# Altium PCB MCU_Transceiver_Board.PcbDoc
Units mil, origin at the board's own origin, x right, y up, seen from the top; angles counter-clockwise.
Board outline 2855 x 2555 mil, 2 copper layers (Top Layer, Bottom Layer); 78 components, 60 nets, 301 pads, 143 vias.
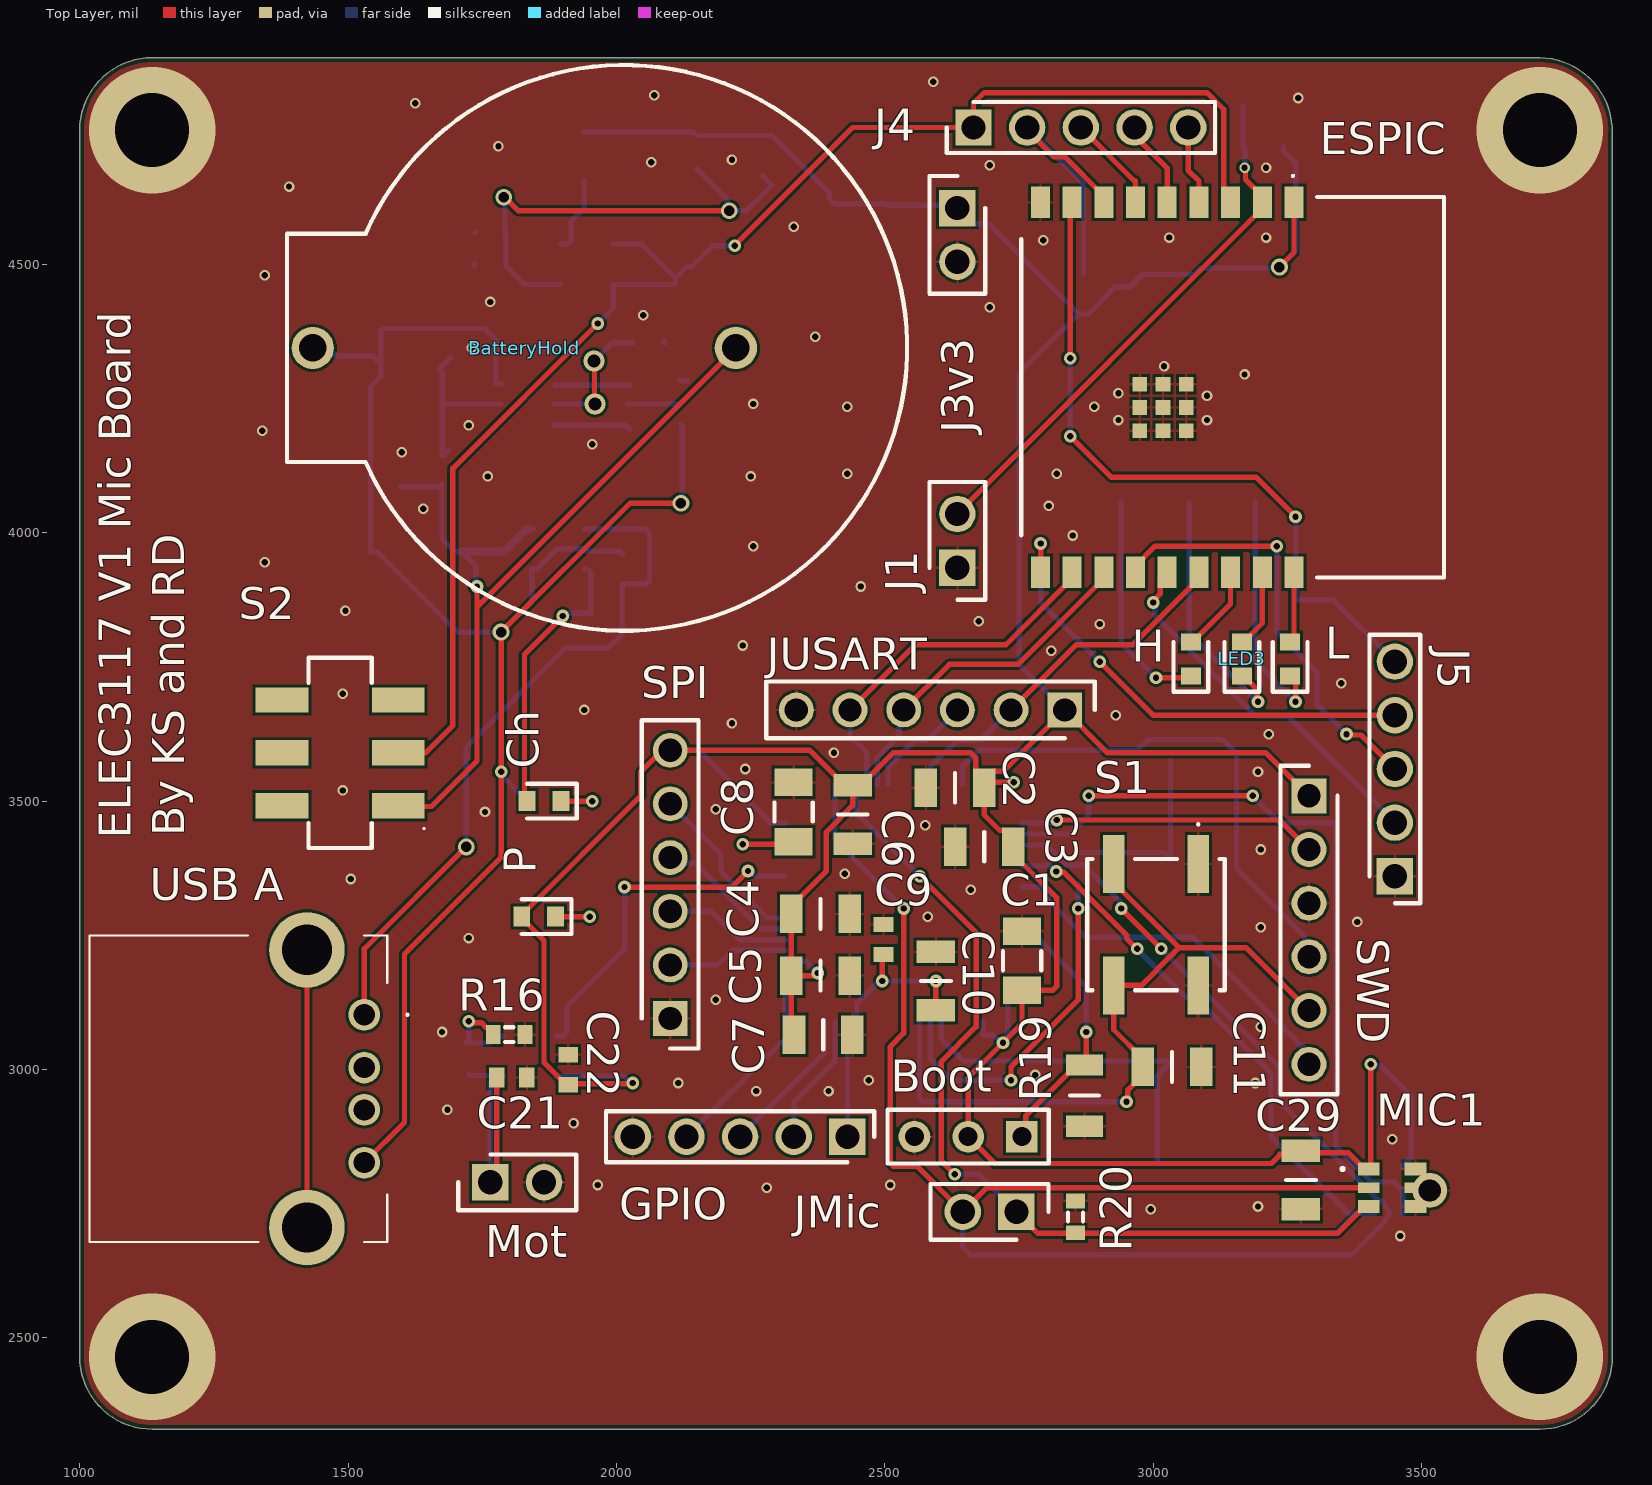
[diagram p0: Top Layer view]
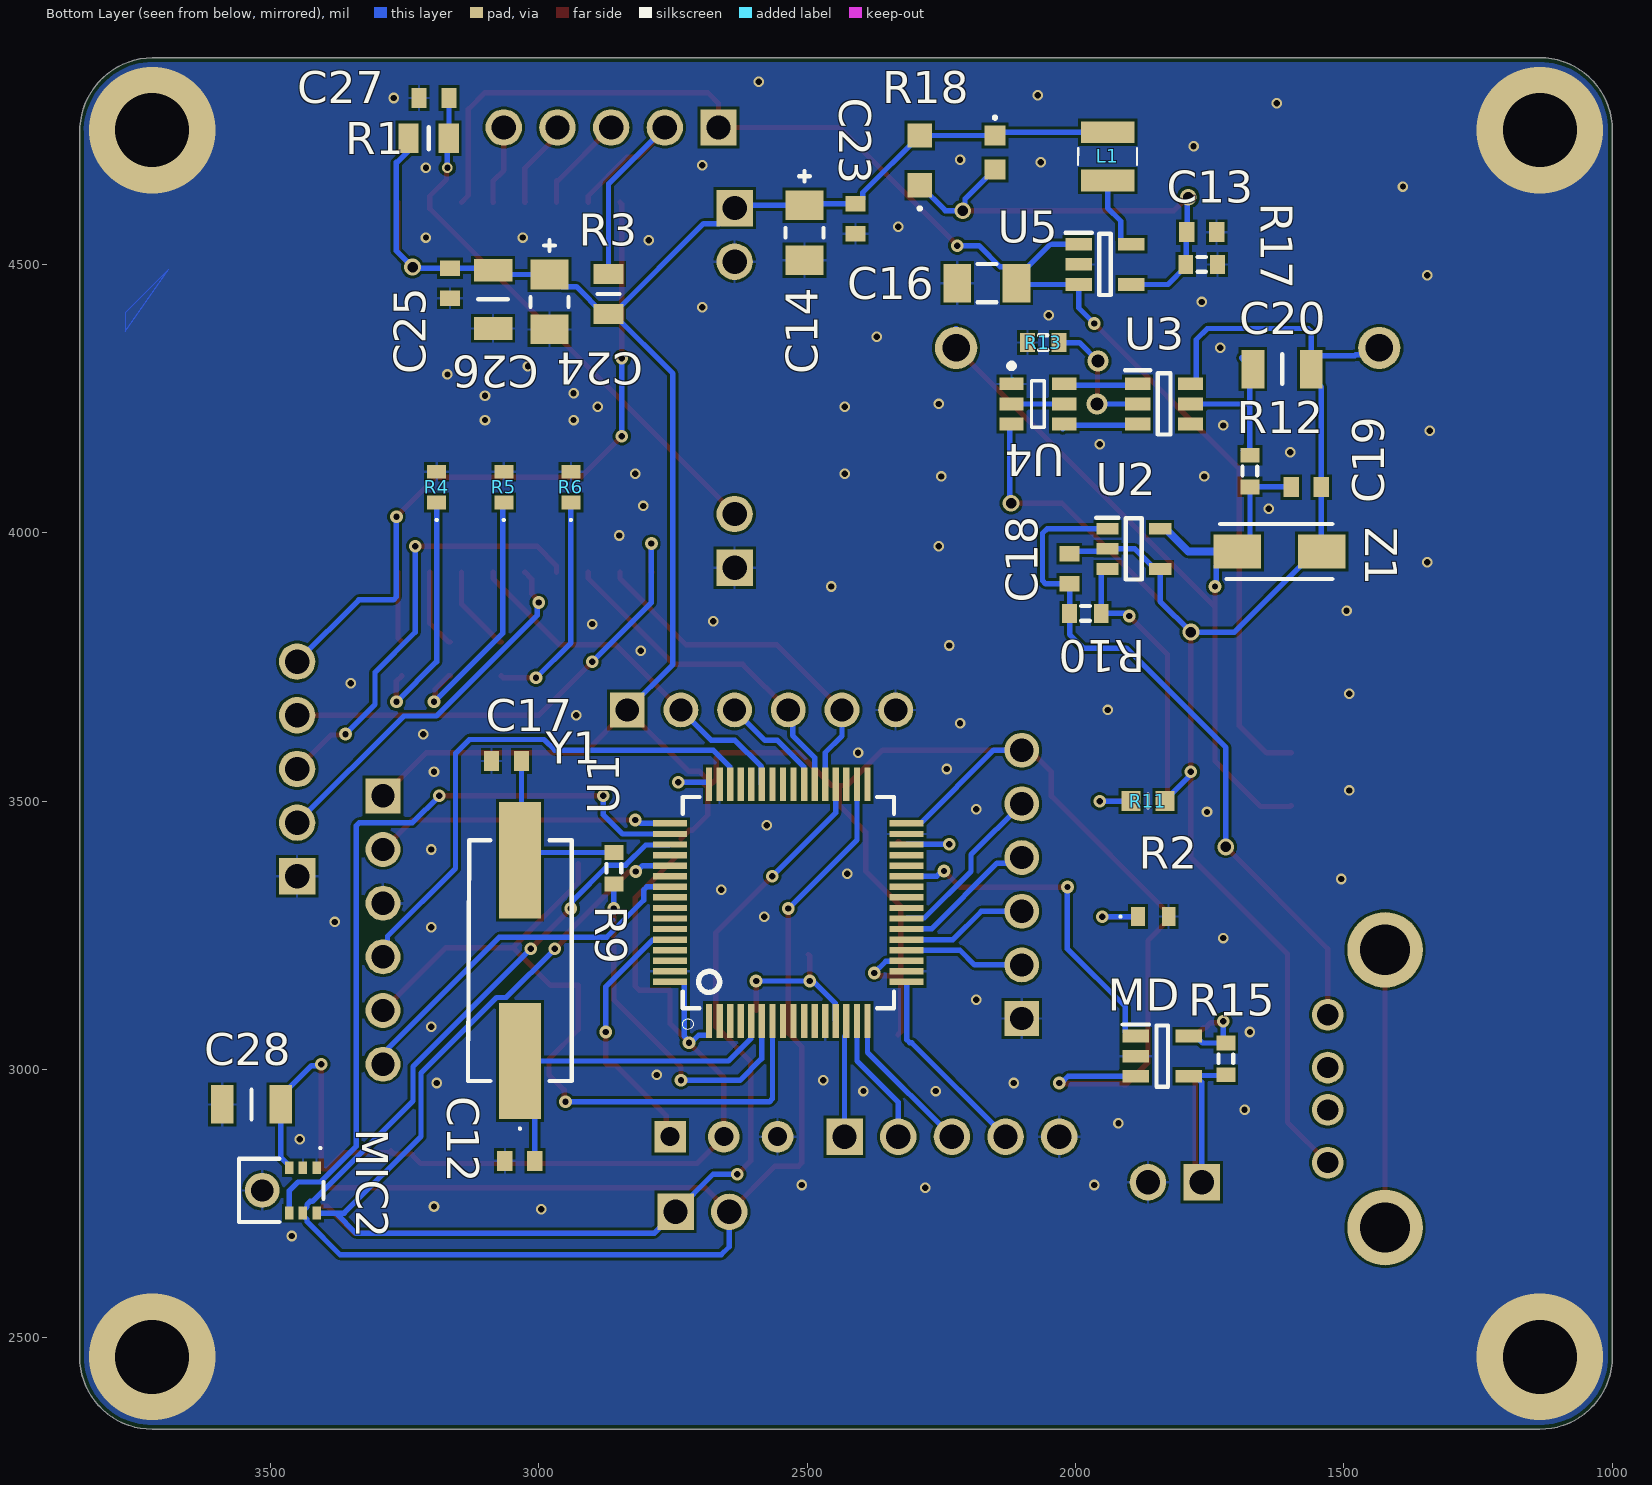
[diagram p1: Bottom Layer view, seen from below]
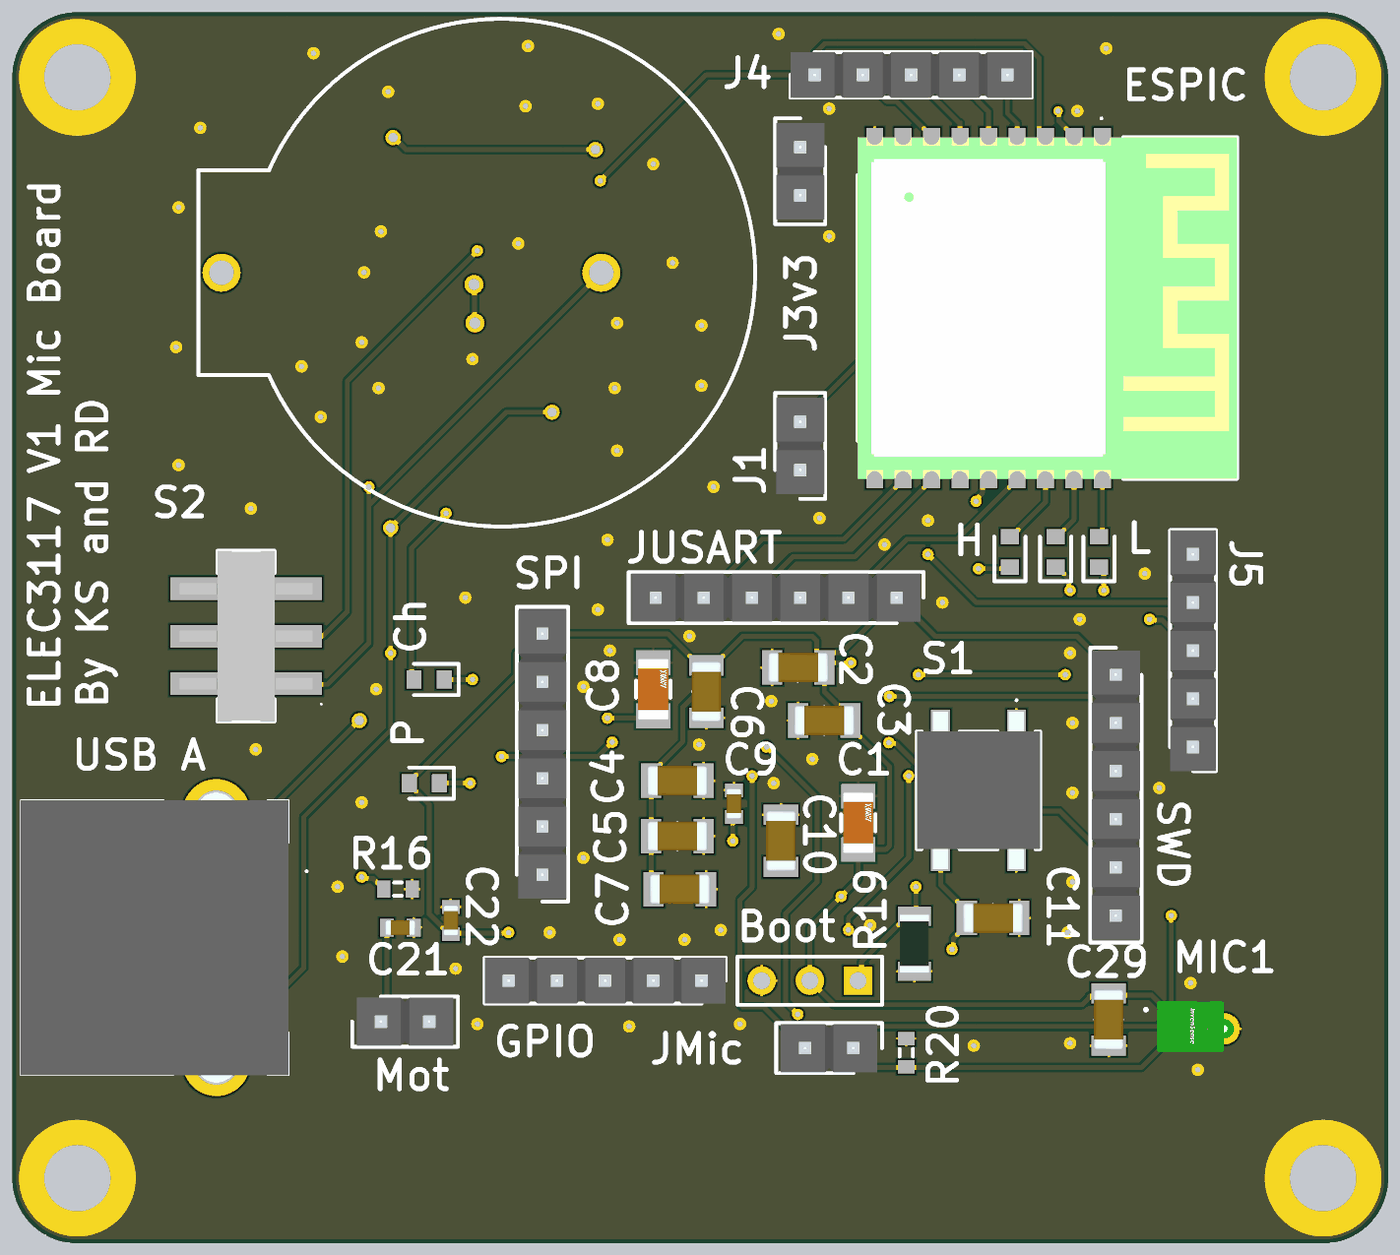
[diagram p2: 3D render of the assembled board from above, using the file's embedded part models]
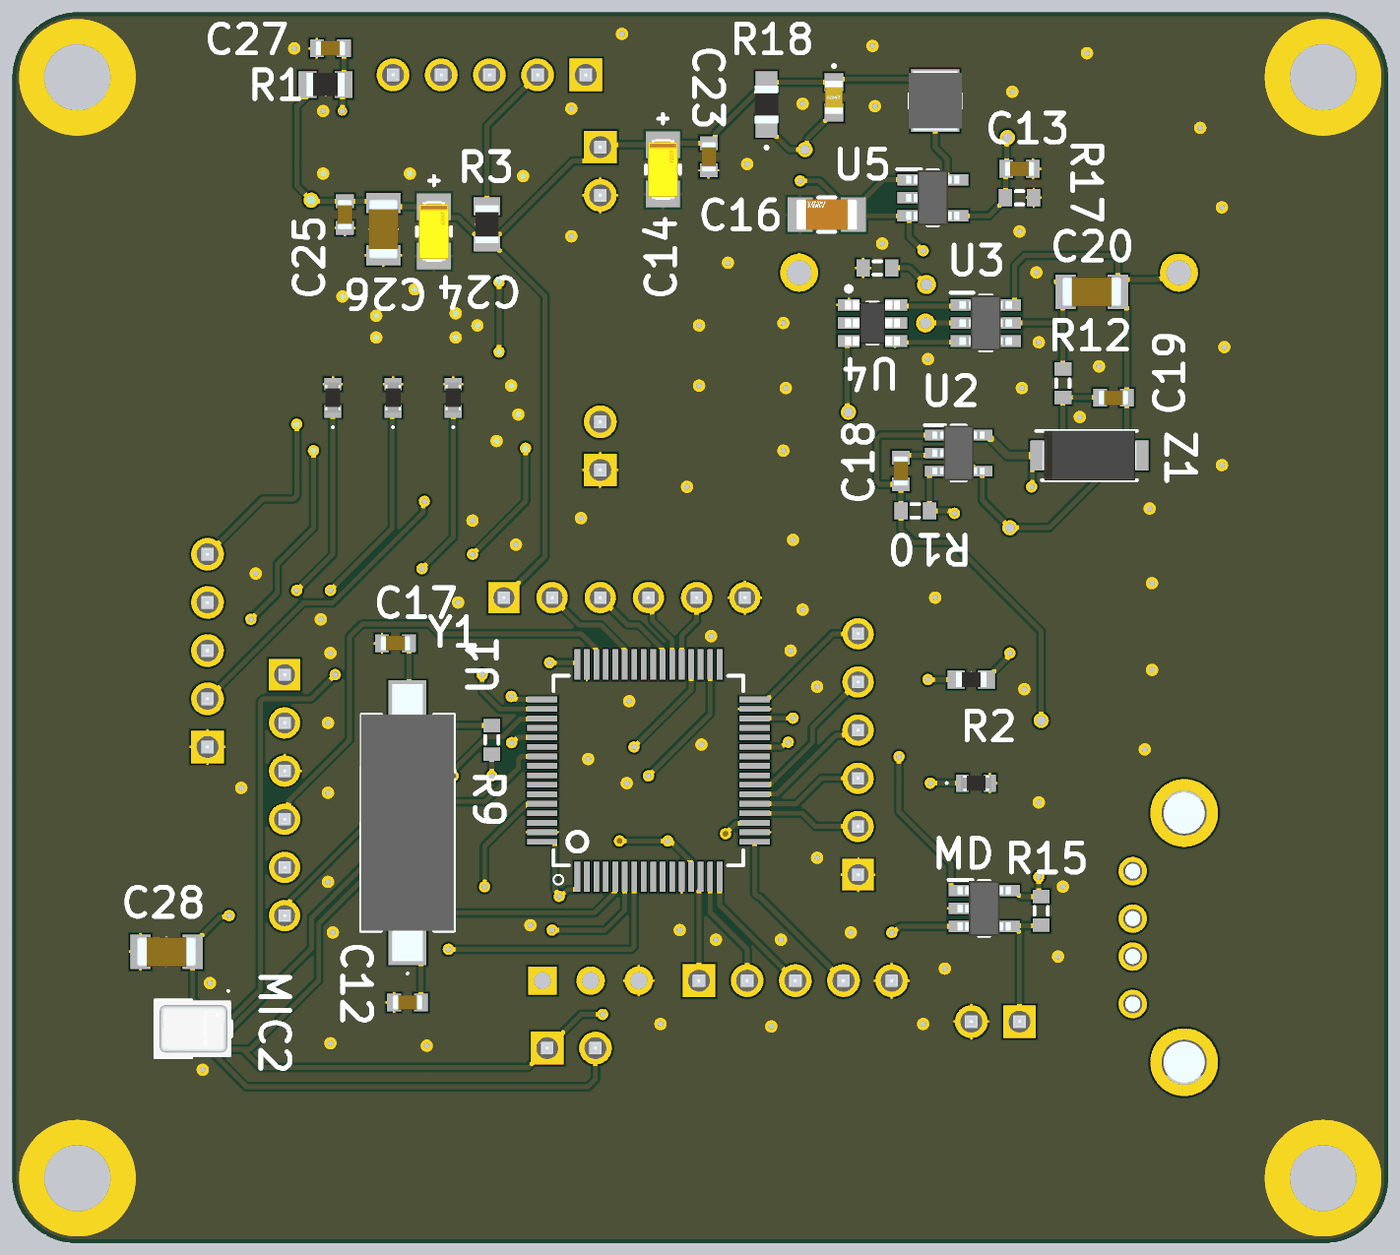
[diagram p3: 3D render of the assembled board from below, using the file's embedded part models]

## Layer stack, top to bottom
Top Solder: solder mask 0.4, Solder Resist, Dk 3.5
Top Layer: signal copper 1.4
Dielectric 1: dielectric 12.6, FR-4, Dk 4.5
Bottom Layer: signal copper 1.4
Bottom Solder: solder mask 0.4, Solder Resist, Dk 3.5

## Board outline
1000,2465 1000,4750 cw(c1135,4750) 1135,4885 3720,4885 cw(c3717.5,4747.5) 3855,4745 3855,2465 cw(c3720,2465) 3720,2330 1135,2330 cw(c1135,2465)

## Design rules (kind name [scope] priority, off if disabled: settings)
BoardOutlineClearance [All] p1: gap=7.87 ignorepadtopadclearanceinfootprint=FALSE
Clearance [All] p1: gap=5 ignorepadtopadclearanceinfootprint=FALSE except(9.84: Arc-Hole Track-Hole SMDPad-Hole THPad-Hole Via-Hole Fill-Hole Poly-Hole Region-Hole Text-Hole)
ComponentClearance [All] p1: gap=5 collisioncheckmode=3 verticalgap=5 showdistances=TRUE
DiffPairsRouting [All] p1: maxlimit=10 minlimit=5 mostfreqgap=5 toplayer_minwidth=5 toplayer_maxwidth=1000 toplayer_prefwidth=5 bottomlayer_minwidth=5 bottomlayer_maxwidth=1000 bottomlayer_prefwidth=5 maxuncoupledlength=500
Height [All] p1: minheight=0 maxheight=71497.94 prefheight=500
HoleSize [All] p1: absolutevalues=TRUE maxlimit=248.03 minlimit=11.81 maxpercent=80.000 minpercent=20.000
HoleToHoleClearance [All] p1: gap=9.84 allowstackedmicrovias=FALSE
MinimumAnnularRing [All] p1: minimumring=3
MinimumSolderMaskSliver [All] p1: minsoldermaskwidth=0
PlaneClearance [All] p1: clearance=5
PlaneConnect PlaneConnectPowerPads [InPadClass('PowerPads')] p1: planeconnectstyle=Direct reliefexpansion=20 reliefentries=4 reliefconductorwidth=10 reliefairgap=10
PlaneConnect [All] p2: pad.planeconnectstyle=Relief pad.reliefexpansion=11.81 pad.reliefentries=4 pad.reliefconductorwidth=5 pad.reliefairgap=5 via.planeconnectstyle=Direct via.reliefexpansion=11.81 via.reliefentries=4 via.reliefconductorwidth=5 via.reliefairgap=5
PolygonConnect PolygonConnectPowerPads [All vs (InPadClass('PowerPads'))] p1: connectstyle=Direct reliefconductorwidth=10 reliefentries=4 polygonreliefangle="90 Angle" airgapwidth=10
PolygonConnect [All] p2: thpad.connectstyle=Relief thpad.reliefconductorwidth=5 thpad.reliefentries=4 thpad.polygonreliefangle="90 Angle" thpad.airgapwidth=5 smdpad.connectstyle=Relief smdpad.reliefconductorwidth=5 smdpad.reliefentries=4 smdpad.polygonreliefangle="90 Angle" smdpad.airgapwidth=5 via.connectstyle=Direct via.reliefconductorwidth=5 via.reliefentries=4 via.polygonreliefangle="90 Angle" via.airgapwidth=5
RoutingVias [All] p1: holewidth=11.81 width=23.62 viastyle="Through Hole" minholewidth=11.81 minwidth=23.62 maxholewidth=23.62 maxwidth=259.84
SilkToSilkClearance [All] p1: silktosilkclearance=0
SilkToSolderMaskClearance [IsPad] p1: minsilkscreentomaskgap=5 clearancetoexposedcopper=TRUE
SolderMaskExpansion [All] p1: expansion=2.95 istentingtop=FALSE
Width [All] p1: maxlimit=1000 minlimit=5 preferedwidth=5 minimp=50.000000 maximp=50.000000 favimp=50.000000
20 further rules are at their usual default settings.

## Classes and differential pairs
component class "Voltage Regulation": "        " C13 C14 C15 C16 C23 J3v3 L1 R17 R18 U5
component class "Motor Circuit": C21 C22 MD Mot R15 R16
component class Microphone: JMic MIC1 MIC2 R20
component class MCU_Transceiver_Board: Boot C1 C2 C4 C5 C6 C7 C8 C9 C10 C11 C12 C17 C28 C29 GPIO JUSART R9 R19 S1 SPI SWD U1 Y1
component class ESP32: C24 C25 C26 C27 ESPIC H IC1 J1 J4 J5 L LED3 P R1 R2 R3 R4 R5 R6
component class "Battery System": BatteryHold C18 C19 C20 Ch R10 R11 R12 R13 S2 U2 U3 U4 "USB A" Z1

## Components (designator, comment, footprint, x,y, rotation, side; value= is the part's Value field where it differs from the comment)
BatteryHold "1053" 1053 2015,4344.42 r180 top
Boot "Header 3" HDR1X3 2755,2875 r180 top
C1 "4.7uF" FP-1206-L_3_2_0_2-W_1_6_0-IPC_B 2755.47,3202.71 r90 top
C2 "0.1uF" CAPC3216X180N 2630.67,3525 r0 top
C3 "0.1uF" CAPC3216X180N 2685,3415 r0 top
C4 "0.1uF" CAPC3216X180N 2380,3290 r180 top
C5 "0.1uF" CAPC3216X180N 2380,3175 r180 top
C6 "0.1uF" CAPC3216X180N 2440,3475 r90 top
C7 "0.1uF" CAPC3216X180N 2385,3065 r180 top
C8 "4.7uF" FP-1206-L_3_2_0_2-W_1_6_0-IPC_B 2330,3479.85 r90 top
C9 "1uF" CAPC1608X90N 2497.5,3242.32 r270 top
C10 "0.1uF" CAPC3216X180N 2595,3165 r270 top
C11 "0.1uF" CAPC3216X180N 3035,3005 r180 top
C12 "10pF" CAPC1608X90N 3035,2830 r180 bottom
C13 "150pF" CAPC1608X90N 1765,4560 r180 bottom
C14 "10uF" FP-TAJS-MFG 2505,4558.82 r90 bottom
C16 "4.7uF" FP-1206-L_3_2_0_2-W_1_6_0-IPC_B 2165,4465 r0 bottom
C17 "10pF" CAPC1608X90N 3060,3575 r180 bottom
C18 "1uF" CAPC1608X90N 2011.38,3932.84 r270 bottom
C19 "1uF" CAPC1608X90N 1570,4085 r0 bottom
C20 "0.1uF" CAPC3216X180N 1615,4305 r0 bottom
C21 "1uF" CAPC1608X90N 1805,2985 r180 top
C22 "1uF" CAPC1608X90N 1910,3000 r270 top
C23 "10uF (DNP)" CAPC1608X90N 2410,4585 r90 bottom
C24 "10uF (DNP)" FP-TAJS-MFG 2980,4430 r90 bottom
C25 "10uF" CAPC1608X90N 3165,4465 r270 bottom
C26 "0.1uF" CAPC3216X180N 3085,4435 r90 bottom
C27 "1uF" CAPC1608X90N 3195,4810 r180 bottom
C28 "0.1uF" CAPC3216X180N 3535,2935 r180 bottom
C29 "0.1uF" CAPC3216X180N 3275,2794.33 r90 top
Ch "KP-1608CGCK" LEDC1608X120N 1865,3500 r180 top (schematic designator CH)
ESPIC "ESP32-C3-WROOM-02-H4" ESP32C3WROOM02H4 2754.14,4645.12 r270 top
GPIO "68000-105HTLF" HDRV5W67P0X254_1X5_1270X241X858P 2430.23,2875 r180 top
H "KP-1608CGCK" LEDC1608X120N 3070,3765 r90 top
J1 "M20-9990246" HDRV2W66P0X254_1X2_508X254X874P 2635,3935 r90 top
J3v3 "M20-9990246" HDRV2W66P0X254_1X2_508X254X874P 2635,4605 r270 top
J4 "68000-105HTLF" HDRV5W67P0X254_1X5_1270X241X858P 2665,4755 r0 top
J5 "68000-105HTLF" HDRV5W67P0X254_1X5_1270X241X858P 3450,3360 r90 top
JMic "M20-9990246" HDRV2W66P0X254_1X2_508X254X874P 2745,2735 r180 top
JUSART "61300611121" HDRV6W64P0X254_1X6_1524X254X869P 2835,3670 r180 top
L "KP-1608CGCK" LEDC1608X120N 3255,3765 r90 top
L1 "10uH" AISC1008F100GT 1940,4701.39 r90 bottom
LED3 "KP-1608CGCK" LEDC1608X120N 3165,3765 r90 top
MD "MAX1749EUK+T" SOT95P280X145-5N 1838.28,3025 r180 bottom (schematic designator MDrive1)
MIC1 "ICS-41351" ICS41351 3445,2780 r270 top (schematic designator PDM_MIC)
MIC2 "ICS-43432" ICS43432 3515,2775 r180 bottom (schematic designator PDM_MIC2)
Mot "M20-9990246" HDRV2W66P0X254_1X2_508X254X874P 1765,2790 r0 top (schematic designator JMotor)
P "KP-1608CGCK" LEDC1608X120N 1855,3285 r180 top
R1 "10k" RESC2012X60N 3205,4735 r180 bottom
R2 "62R" ERJH3 1855,3285 r180 bottom
R3 "10k" RESC2012X60N 2870,4445 r90 bottom
R4 "62R" ERJH3 3190,4085 r90 bottom
R5 "62R" ERJH3 3065,4085 r90 bottom
R6 "62R" ERJH3 2940,4085 r90 bottom
R9 "Res3" J1-0603 2860,3375 r270 bottom value=DNP
R10 "Res3" J1-0603 1981.38,3850 r0 bottom value=100k
R11 "150R" RESC1608X55N 1865,3500 r180 bottom
R12 "Res3" J1-0603 1675,4115 r90 bottom value=100
R13 "Res3" J1-0603 2060,4354.34 r0 bottom value=1k
R15 "Res3" J1-0603 1720,3020 r270 bottom value=160k
R16 "Res3" J1-0603 1800,3065 r180 top value=100k
R17 "Res3" J1-0603 1765,4500 r180 bottom value=100k
R18 "560k" ERJS06_U06_(0805) 2290,4693.74 r90 bottom
R19 "1k" RESC3016X65N 2871.94,2951.55 r270 top
R20 "Res3" J1-0603 2855,2725.47 r270 top value=100k
S1 "EVP-BV4C1L000" EVPBV4C1L000 3005,3270 r90 top
S2 "JS202011SCQN" JS202011SCQN 1485,3590 r90 top
SPI "61300611121" HDRV6W64P0X254_1X6_1524X254X869P 2100,3095 r90 top
SWD "61300611121" HDRV6W64P0X254_1X6_1524X254X869P 3290,3510 r270 top
U1 "STM32F401RBT6" QFP50P1200X1200X160-64N 2535,3310.97 r90 bottom
U2 "MAX1555EZK+T" SOT95P275X110-5N 1891.38,3970 r180 bottom
U3 "FS312F-G" SOT95P280X145-6N 1835,4240 r180 bottom
U4 "SOT23_6" SOT95P275X110-6N 2070,4240 r180 bottom
U5 "TPS62204DBVT" SOT95P280X145-5N 1945,4500 r180 bottom
"USB A" "USB-A1HSB6" USBA1HSB6 1530,3102.17 r270 top
Y1 "LFXTAL050985Bulk" LFXTAL050985Bulk 3035,3202.98 r90 bottom
Z1 "PTZTFTE253.3B" DIOM5026X220N 1620,3965 r180 bottom
? "27pF" C0603 2150,4708.5 r270 bottom

## Footprints (in the part's own frame and the unit in brackets; to place one, negate y for a bottom-side part, rotate by r counter-clockwise, add the part's x,y. Pads: shape width x height; smd on the part's side, far side on the other; paste and mask are expansions set on the pad)
1053 [mm]
  round 2 hole 1.3: 1(-5.265,0) 2(14.755,0)
  silkscreen extent -13.37,-13.38 15.97,13.38
AISC1008F100GT [mm]
  rect 1.02x2.54 smd: 1(-1.145,0) 2(1.145,0)
  silkscreen extent -0.4,-1.4 0.4,1.4, body extent -1.55,-1.4 1.55,1.4, height 2.39
C0603 [mm]
  rect 0.95x1 smd: 1(-0.8,0) 2(0.8,0)
  silkscreen extent -1.7,-0.05 -1.6,0.05, body extent -0.87,-0.48 0.88,0.47, height 0.87
CAPC1608X90N [mm]
  rect 0.73x0.94 smd: 1(-0.71,0) 2(0.71,0)
  body extent -0.8,-0.4 0.8,0.4, height 0.9
CAPC3216X180N [mm]
  rect 1.07x1.82 smd: 1(-1.38,0) 2(1.38,0)
  silkscreen extent 0,-0.7 0,0.7, body extent -1.6,-0.8 1.6,0.8, height 1.8
DIOM5026X220N [mm]
  rect 2.25x1.6 smd: 1(-2,0) 2(2,0)
  silkscreen extent -2.8,-1.3 2.5,1.3, body extent -2.5,-1.3 2.5,1.3, height 2.2
ERJH3 [mm]
  rect 0.65x0.9 smd: 1(-0.725,0) 2(0.725,0)
  silkscreen extent -1.6,-0.05 -1.5,0.05, body extent -0.8,-0.4 0.8,0.4, height 0.55
ERJS06_U06_(0805) [mm]
  rect 1.15x1.15 smd: 1(-1.175,0) 2(1.175,0)
  silkscreen extent -2.32,-0.05 -2.23,0.05, body extent -1,-0.63 1,0.63, height 0.6
ESP32C3WROOM02H4 [mm]
  rect 1.5x0.9 smd: 1(0.75,12.9) 2(0.75,11.4) 3(0.75,9.9) 4(0.75,8.4) 5(0.75,6.9) 6(0.75,5.4) 7(0.75,3.9) 8(0.75,2.4) 9(0.75,0.9) 10(18.25,0.9) 11(18.25,2.4) 12(18.25,3.9) 13(18.25,5.4) 14(18.25,6.9) 15(18.25,8.4) 16(18.25,9.9) 17(18.25,11.4) 18(18.25,12.9)
  rect 0.7x0.7 smd: 19(10.46,6.7) 20(11.56,6.7) 21(11.56,7.8) 22(10.46,7.8) 23(9.36,7.8) 24(9.36,6.7) 25(9.36,5.6) 26(10.46,5.6) 27(11.56,5.6)
  silkscreen extent -0.55,0 18.5,20, body extent 0.5,0 18.5,20, height 3.2
EVPBV4C1L000 [mm]
  rect 2.75x1 smd: A1(2.875,-2) A2(-2.875,-2) B1(2.875,2) B2(-2.875,2)
  silkscreen extent -3.1,-3.25 4.8,3.25, body extent -4.15,-3.25 4.15,3.25, height 3.8
FP-1206-L_3_2_0_2-W_1_6_0-IPC_B [mil]
  rect 51.36x71.11 smd paste+0 mask+0: 1(-55.15,0) 2(55.15,0)
  silkscreen extent -18,-36 18,36, body extent -63,-31 63,31, height 90
FP-TAJS-MFG [mm]
  rect 1.4x1.8 smd paste+0 mask+0: 1(-1.3,0) 2(1.3,0)
  silkscreen extent -0.23,-0.9 2.93,0.9, body extent -1.6,-0.8 1.6,0.8, height 1.2
HDR1X3 [mm] "Connector; Header; 3 Position"
  rect 1.5x1.5 hole 0.9: 1(0,0)
  round 1.5 hole 0.9: 2(2.54,0) 3(5.08,0)
  silkscreen extent -1.27,-1.27 6.35,1.27
HDRV2W66P0X254_1X2_508X254X874P [mm]
  rect 1.725x1.725 hole 1.15: 1(0,0)
  round 1.725 hole 1.15: 2(2.54,0)
  silkscreen extent -1.52,-1.32 4.06,1.32, body extent -1.27,-1.27 3.81,1.27, height 8.74
HDRV5W67P0X254_1X5_1270X241X858P [mm]
  rect 1.725x1.725 hole 1.15: 1(0,0)
  round 1.725 hole 1.15: 2(2.54,0) 3(5.08,0) 4(7.62,0) 5(10.16,0)
  silkscreen extent -1.27,-1.2 11.43,1.2, body extent -1.27,-1.2 11.43,1.2, height 8.58
HDRV6W64P0X254_1X6_1524X254X869P [mm]
  rect 1.65x1.65 hole 1.1: 1(0,0)
  round 1.65 hole 1.1: 2(2.54,0) 3(5.08,0) 4(7.62,0) 5(10.16,0) 6(12.7,0)
  silkscreen extent -1.42,-1.35 14.12,1.35, body extent -1.27,-1.27 13.97,1.27, height 8.69
ICS41351 [mm]
  rect 0.622x1.032 smd: 1(-0.884,-1.105) 3(0.884,-1.105) 4(0.884,1.105) 6(-0.884,1.105)
  rect 0.5x1.032 smd: 2(0,-1.105) 5(0,1.105)
  silkscreen extent -0.93,-2.4 -0.83,-2.3, body extent -1.33,-1.75 1.33,1.75, height 0.91
ICS43432 [mm]
  rect 0.4x0.6 smd: 1(2.575,1.075) 2(1.925,1.075) 3(1.275,1.075) 5(1.275,-1.075) 6(1.925,-1.075) 7(2.575,-1.075)
  round 1.65 hole 1.05: 4(0,0)
  silkscreen extent -1.1,-1.5 2.9,2.05, body extent -1.09,-1.5 2.91,1.5, height 1
J1-0603 [mm] "Chip Resistor, Body 1.6x0.8mm, IPC High Density"
  rect 0.7x0.9 smd: 1(-0.75,0) 2(0.75,0)
  silkscreen extent -0.2,-0.35 0.2,0.35, body extent -0.85,-0.48 0.85,0.48, height 0.9
JS202011SCQN [mm]
  rect 1.2x2.5 smd: 1(-2.5,-2.75) 2(0,-2.75) 3(2.5,-2.75) 4(2.5,2.75) 5(0,2.75) 6(-2.5,2.75)
  silkscreen extent -4.5,-4 4.5,1.5, body extent -4.5,-3.5 4.5,3.5, height 5.65
LEDC1608X120N [mm]
  rect 0.8x0.95 smd: 1(-0.8,0) 2(0.8,0)
  silkscreen extent -1.55,-0.82 0.8,0.82
LFXTAL050985Bulk [mm]
  rect 5.5x2 smd: 1(-4.75,0) 2(4.75,0)
  silkscreen extent -8,-2.45 5.7,2.45, body extent -7.3,-2.45 7.3,2.45, height 4.4
QFP50P1200X1200X160-64N [mm]
  rect 1.6x0.3 smd: 1(-5.6,3.75) 2(-5.6,3.25) 3(-5.6,2.75) 4(-5.6,2.25) 5(-5.6,1.75) 6(-5.6,1.25) 7(-5.6,0.75) 8(-5.6,0.25) 9(-5.6,-0.25) 10(-5.6,-0.75) 11(-5.6,-1.25) 12(-5.6,-1.75) 13(-5.6,-2.25) 14(-5.6,-2.75) 15(-5.6,-3.25) 16(-5.6,-3.75) 33(5.6,-3.75) 34(5.6,-3.25) 35(5.6,-2.75) 36(5.6,-2.25) 37(5.6,-1.75) 38(5.6,-1.25) 39(5.6,-0.75) 40(5.6,-0.25) 41(5.6,0.25) 42(5.6,0.75) 43(5.6,1.25) 44(5.6,1.75) 45(5.6,2.25) 46(5.6,2.75) 47(5.6,3.25) 48(5.6,3.75)
  rect 0.3x1.6 smd: 17(-3.75,-5.6) 18(-3.25,-5.6) 19(-2.75,-5.6) 20(-2.25,-5.6) 21(-1.75,-5.6) 22(-1.25,-5.6) 23(-0.75,-5.6) 24(-0.25,-5.6) 25(0.25,-5.6) 26(0.75,-5.6) 27(1.25,-5.6) 28(1.75,-5.6) 29(2.25,-5.6) 30(2.75,-5.6) 31(3.25,-5.6) 32(3.75,-5.6) 49(3.75,5.6) 50(3.25,5.6) 51(2.75,5.6) 52(2.25,5.6) 53(1.75,5.6) 54(1.25,5.6) 55(0.75,5.6) 56(0.25,5.6) 57(-0.25,5.6) 58(-0.75,5.6) 59(-1.25,5.6) 60(-1.75,5.6) 61(-2.25,5.6) 62(-2.75,5.6) 63(-3.25,5.6) 64(-3.75,5.6)
  silkscreen extent -6,-5 5,5
RESC1608X55N [mm]
  rect 0.9x0.95 smd: 1(-0.8,0) 2(0.8,0)
  silkscreen extent 0,-0.3 0,0.3, body extent -0.8,-0.4 0.8,0.4, height 0.55
RESC2012X60N [mm]
  rect 0.95x1.4 smd: 1(-0.95,0) 2(0.95,0)
  silkscreen extent 0,-0.53 0,0.53, body extent -1,-0.63 1,0.63, height 0.6
RESC3016X65N [mm]
  rect 1x1.75 smd: 1(-1.45,0) 2(1.45,0)
  silkscreen extent 0,-0.67 0,0.67, body extent -1.53,-0.77 1.53,0.77, height 0.65
SOT95P275X110-5N [mm]
  rect 1.05x0.55 smd: 1(-1.25,0.95) 2(-1.25,0) 3(-1.25,-0.95) 4(1.25,-0.95) 5(1.25,0.95)
  silkscreen extent -1.78,-1.45 0.38,1.48, body extent -1.38,-1.45 1.38,1.45, height 1.1
SOT95P275X110-6N [mm] "SOT23, 6-Leads, Body 2.00x2.75mm, Pitch 0.95mm, IPC Medium Density"
  rect 1.15x0.6 smd: 1(-1.25,0.95) 2(-1.25,0) 3(-1.25,-0.95) 4(1.25,-0.95) 5(1.25,0) 6(1.25,0.95)
  silkscreen extent -1.38,-1.1 0.3,1.92, body extent -1.45,-1.18 1.45,1.18, height 1.1
SOT95P280X145-5N [mm]
  rect 1.25x0.6 smd: 1(-1.25,0.95) 2(-1.25,0) 3(-1.25,-0.95) 4(1.25,-0.95) 5(1.25,0.95)
  silkscreen extent -1.88,-1.45 0.28,1.5, body extent -1.4,-1.45 1.4,1.45, height 1.45
SOT95P280X145-6N [mm]
  rect 1.2x0.6 smd: 1(-1.25,0.95) 2(-1.25,0) 3(-1.25,-0.95) 4(1.25,-0.95) 5(1.25,0) 6(1.25,0.95)
  silkscreen extent -1.85,-1.45 0.3,1.6, body extent -1.4,-1.45 1.4,1.45, height 1.45
USBA1HSB6 [mm]
  round 1.5 hole 1: 1(0,0) 2(2.5,0) 3(4.5,0) 4(7,0)
  round 3.57 hole 2.38: MH1(-3.07,-2.71) MH2(10.07,-2.71)
  silkscreen extent -3.75,-13 10.75,2.1, body extent -4.15,-13.01 11.16,1.09, height 7.2

## Part data
BatteryHold: "Undefined or Miscellaneous", Manufacturer_Name="Keystone Electronics", Mouser Part Number=534-1053-BH, Arrow Part Number=1053, Arrow Price/Stock=https://www.arrow.com/en/products/1053/keystone-electronics, Datasheet Link=http://www.keyelco.com/product-pdf.cfm?p=751, Manufacturer_Part_Number=1053, Mouser Price/Stock=https://www.mouser.co.uk/ProductDetail/Keystone-Electronics/1053?qs=%2F7TOpeL5Mz4zfgvqwo9sng%3D%3D
Boot: "Header, 3-Pin", LatestRevisionDate=17-Jul-2002, LatestRevisionNote="Re-released for DXP Platform.", Publisher="Altium Limited"
C1 C8 C16: library part CMP-04427-012562-1, "General Purpose Ceramic Capacitor, 1206, 4.7uF, 20%, X5R, 15%, 16V, 1206YD475MAT2A", Case Code (Imperial)=1206, Case Code (Metric)=3216, Dielectric=X5R, Max Operating Temperature=85°C, Min Operating Temperature=-55°C, Package Quantity=1, Tolerance=20%, Voltage Rating=16V, Capacitance=4.7uF, Case/Package=1206, Construction=Flat, Contact Plating=Tin, Depth=1.6mm, Dissipation Factor=5%, Height=0.07mm, Lead Free="Lead Free", Length=3.2mm, Mount="Surface Mount", Number of Pins=2, Packaging="Tape and Reel", Radiation Hardening=No, RoHS Compliant=Yes, Series=-, Termination=SMD/SMT, Thickness=0.07inch, Voltage Rating (DC)=16V, Width=0.063inch
C2 C10 C11 C20 C26 C28 C29: library part GCM31C5C1H104FA16L, "Capacitor, GCM31C5C1H104FA16L, 1206", Manufacturer_Name="Murata Electronics", Mouser Part Number=81-GCM31C5C1H104FA16, Arrow Part Number=GCM31C5C1H104FA16L, Arrow Price/Stock=https://www.arrow.com/en/products/gcm31c5c1h104fa16l/murata-manufacturing, Datasheet Link=https://www.digikey.in/product-detail/en/murata-electronics/GCM31C5C1H104FA16L/490-GCM31C5C1H104FA16LCT-ND/11618925, Height=1.8mm, Manufacturer_Part_Number=GCM31C5C1H104FA16L, Mouser Price/Stock=https://www.mouser.co.uk/ProductDetail/Murata-Electronics/GCM31C5C1H104FA16L?qs=rrS6PyfT74fke0d0BEF0PA%3D%3D
C3 C4 C5 C6 C7: library part GCM31C5C1H104FA16L, "Capacitor, C5C1H104FA16L", Manufacturer_Name="Murata Electronics", Mouser Part Number=81-GCM31C5C1H104FA16, Arrow Part Number=GCM31C5C1H104FA16L, Arrow Price/Stock=https://www.arrow.com/en/products/gcm31c5c1h104fa16l/murata-manufacturing, Datasheet Link=https://www.digikey.in/product-detail/en/murata-electronics/GCM31C5C1H104FA16L/490-GCM31C5C1H104FA16LCT-ND/11618925, Height=1.8mm, Manufacturer_Part_Number=GCM31C5C1H104FA16L, Mouser Price/Stock=https://www.mouser.co.uk/ProductDetail/Murata-Electronics/GCM31C5C1H104FA16L?qs=rrS6PyfT74fke0d0BEF0PA%3D%3D
C9 C18 C19 C21 C22 C27: library part 0603YC105JAT2A, "Capacitor, 0603YC10JAT2A", Manufacturer_Name=AVX, Mouser Part Number=581-0603YC105JAT2A, Arrow Part Number=0603YC105JAT2A, Arrow Price/Stock=https://www.arrow.com/en/products/0603yc105jat2a/avx, Datasheet Link=http://www.mouser.com/catalog/supplier/library/pdf/AVXSurfaceMountCeramic.pdf, Height=0.9mm, Manufacturer_Part_Number=0603YC105JAT2A, Mouser Price/Stock=https://www.mouser.co.uk/ProductDetail/AVX/0603YC105JAT2A/?qs=RCLU9o6%252BptxSjO%252BNXwzoBQ%3D%3D
C12 C17: library part 06035A100F4T4A, "Capacitor, 10pF, 06035A100F4T4A", Manufacturer_Name=AVX, Mouser Part Number=581-06035A100F4T4A, Datasheet Link=https://componentsearchengine.com/Datasheets/1/06031A100FAT2A.pdf, Height=0.9mm, Manufacturer_Part_Number=06035A100F4T4A, Mouser Price/Stock=https://www.mouser.co.uk/ProductDetail/AVX/06035A100F4T4A?qs=T3oQrply3y8l7Nbuh1mZXA%3D%3D
C13: library part CL10C151JB8NNNC, "Capacitor, CL10C151JB8NNNC, 150pF", Manufacturer_Name="Samsung Electro-Mechanics", Mouser Part Number=187-CL10C151JB8NNNC, Arrow Part Number=CL10C151JB8NNNC, Arrow Price/Stock=https://www.arrow.com/en/products/cl10c151jb8nnnc/samsung-electro-mechanics, Datasheet Link=https://datasheet.datasheetarchive.com/originals/dk/DKDS-19/373912.pdf, Height=0.9mm, Manufacturer_Part_Number=CL10C151JB8NNNC, Mouser Price/Stock=https://www.mouser.co.uk/ProductDetail/Samsung-Electro-Mechanics/CL10C151JB8NNNC?qs=349EhDEZ59rP%2F9hZgT8P9g%3D%3D
C14: library part CMP-04424-000459-1, "10uF 2.5V  ±10% 8Ω 1206  SMD Tantalum Capacitor, TAJS106K002RNJ", Case Code (Imperial)=1206, Case Code (Metric)=3216, Dielectric Material=Tantalum, ESR (Equivalent Series Resistance)=8R, Leakage Current=500nA, Max Operating Temperature=125°C, Min Operating Temperature=-55°C, Tolerance=10%, Voltage=2.5V, Capacitance=10uF, Case/Package=1206, Construction=Flat, Depth=1.6mm, Dissipation Factor=6%, Height=1.2mm, Lead Diameter=1.2mm, Lead Free="Lead Free", Lead Pitch=1.1mm, Length=3.2mm, Mount="Surface Mount", Number of Pins=2, Packaging="Tape and Reel", Radiation Hardening=No, REACH SVHC="No SVHC", RoHS Compliant=Yes, Series=TAJ, Termination=SMD/SMT, Voltage Rating=2.5V, Voltage Rating (DC)=2.5V, Weight=0.000571oz, Width=1.6mm
C23 C25: library part CL10A106MQ8NNNC, "Capacitor, CL10A106MQ8NNNC", Manufacturer_Name="Samsung Electro-Mechanics", Mouser Part Number=187-CL10A106MQ8NNNC, Arrow Part Number=CL10A106MQ8NNNC, Arrow Price/Stock=https://www.arrow.com/en/products/cl10a106mq8nnnc/samsung-electro-mechanics?region=nac, Datasheet Link=http://uk.rs-online.com/web/p/products/7664718, Height=0.9mm, Manufacturer_Part_Number=CL10A106MQ8NNNC, Mouser Price/Stock=https://www.mouser.co.uk/ProductDetail/Samsung-Electro-Mechanics/CL10A106MQ8NNNC?qs=349EhDEZ59qlB6a%2FjjeGAg%3D%3D
C24: library part CMP-04424-000459-1, "10uF 2.5V  ±10% 8Ω 1206  SMD Tantalum Capacitor, TAJS106K002RNJ", Capacitance=10uF, Case Code (Imperial)=1206, Case Code (Metric)=3216, Dielectric Material=Tantalum, ESR (Equivalent Series Resistance)=8R, Leakage Current=500nA, Max Operating Temperature=125°C, Min Operating Temperature=-55°C, Tolerance=10%, Voltage=2.5V, Case/Package=1206, Construction=Flat, Depth=1.6mm, Dissipation Factor=6%, Height=1.2mm, Lead Diameter=1.2mm, Lead Free="Lead Free", Lead Pitch=1.1mm, Length=3.2mm, Mount="Surface Mount", Number of Pins=2, Packaging="Tape and Reel", Radiation Hardening=No, REACH SVHC="No SVHC", RoHS Compliant=Yes, Series=TAJ, Termination=SMD/SMT, Voltage Rating=2.5V, Voltage Rating (DC)=2.5V, Weight=0.000571oz, Width=1.6mm
Ch H L LED3 P: "LED", Manufacturer_Name=Kingbright, Mouser Part Number=N/A, Arrow Part Number=KP-1608CGCK, Arrow Price/Stock=https://www.arrow.com/en/products/kp-1608cgck/kingbright?region=europe, Datasheet Link=https://componentsearchengine.com/Datasheets/2/KP-1608CGCK.pdf, Height=1.2mm, Manufacturer_Part_Number=KP-1608CGCK, Mouser Price/Stock=https://www.mouser.co.uk/ProductDetail/Kingbright/KP-1608CGCK?qs=2JU0tDl2GZ3U0MYrqLedOQ%3D%3D
ESPIC: "Integrated Circuit", Manufacturer_Name="Espressif Systems", Mouser Part Number=356-ESP32C3WROOM02H4, Datasheet Link=https://www.mouser.in/datasheet/2/891/Espressif_Systems_04082021_ESP32_C3_WROOM_02-2295851.pdf, Height=3.35mm, Manufacturer_Part_Number=ESP32-C3-WROOM-02-H4, Mouser Price/Stock=https://www.mouser.co.uk/ProductDetail/Espressif-Systems/ESP32-C3-WROOM-02-H4?qs=stqOd1AaK79%2FSA14oWtR%252Bw%3D%3D
GPIO J4 J5: "Connector", Manufacturer_Name=Amphenol, Mouser Part Number=649-68000-105HTLF, Arrow Part Number=68000-105HTLF, Arrow Price/Stock=https://www.arrow.com/en/products/68000-105htlf/amphenol-fci, Datasheet Link=https://www.arrow.com/en/products/68000-105htlf/amphenol-fci, Height=8.58mm, Manufacturer_Part_Number=68000-105HTLF, Mouser Price/Stock=https://www.mouser.co.uk/ProductDetail/Amphenol-FCI/68000-105HTLF?qs=w%2Fv1CP2dgqrYgNyQVoiqDw%3D%3D
J1 J3v3 JMic Mot: "Connector", Manufacturer_Name=Harwin, Mouser Part Number=855-M20-9990246, Datasheet Link=https://cdn.harwin.com/pdfs/M20-999.pdf, Height=8.74mm, Manufacturer_Part_Number=M20-9990246, Mouser Price/Stock=https://www.mouser.co.uk/ProductDetail/Harwin/M20-9990246?qs=Jph8NoUxIfWjw4WmyRvzag%3D%3D
JUSART SPI SWD: "Connector", Manufacturer_Name="Wurth Elektronik", Mouser Part Number=710-61300611121, Datasheet Link=https://componentsearchengine.com/Datasheets/2/61300611121.pdf, Height=8.69mm, Manufacturer_Part_Number=61300611121, Mouser Price/Stock=https://www.mouser.co.uk/ProductDetail/Wurth-Elektronik/61300611121?qs=t4813l51qx%2FRpdf0Kp1HlQ%3D%3D
L1: library part AISC-1008F-100G-T, "Inductor, AISC-1008F-100G-T", Manufacturer_Name=ABRACON, Mouser Part Number=815-AISC1008F100GT, Arrow Part Number=AISC-1008F-100G-T, Arrow Price/Stock=https://www.arrow.com/en/products/aisc-1008f-100g-t/abracon, Datasheet Link=https://www.mouser.com/datasheet/2/3/AISC-1008(F)-27775.pdf, Height=2.29mm, Manufacturer_Part_Number=AISC-1008F-100G-T, Mouser Price/Stock=https://www.mouser.com/Search/Refine.aspx?Keyword=815-AISC1008F100GT
MD: "Integrated Circuit", Manufacturer_Name="Maxim Integrated", Datasheet Link=https://pdfserv.maximintegrated.com/en/ds/MAX1749.pdf, Height=1.45mm, Manufacturer_Part_Number=MAX1749EUK+T
MIC1: "Microphone", Manufacturer_Name=TDK, Mouser Part Number=410-ICS-41351, Arrow Part Number=ICS-41351, Arrow Price/Stock=https://www.arrow.com/en/products/ics-41351/invensense, Datasheet Link=https://product.tdk.com/system/files/dam/doc/product/sw_piezo/mic/mems-mic/data_sheet/ds-000157-ics-41351-v1.1.pdf, Height=1.08mm, Manufacturer_Part_Number=ICS-41351, Mouser Price/Stock=https://www.mouser.co.uk/ProductDetail/TDK-InvenSense/ICS-41351?qs=%252B6g0mu59x7LDJ1mBnROZzA%3D%3D
MIC2: "Integrated Circuit", Manufacturer_Name=TDK, Mouser Part Number=410-ICS-43432, Arrow Part Number=ICS-43432, Arrow Price/Stock=https://www.arrow.com/en/products/ics-43432/invensense?region=nac, Datasheet Link=https://product.tdk.com/system/files/dam/doc/product/sw_piezo/mic/mems-mic/data_sheet/ics-43432-data-sheet-v1.3.pdf, Height=1.1mm, Manufacturer_Part_Number=ICS-43432, Mouser Price/Stock=https://www.mouser.co.uk/ProductDetail/TDK-InvenSense/ICS-43432?qs=u4fy%2FsgLU9PhEy4uYlgedw%3D%3D
R1 R3: library part RC0805FR-7W10KL, "Resistor, RC0805FR-7W10KL, 10k", Manufacturer_Name=KEMET, Mouser Part Number=603-RC0805FR-7W10KL, Datasheet Link=https://datasheet.datasheetarchive.com/originals/distributors/Datasheets_SAMA/902f9e387b938f871d31120f5fc1d65e.pdf, Height=0.6mm, Manufacturer_Part_Number=RC0805FR-7W10KL, Mouser Price/Stock=https://www.mouser.co.uk/ProductDetail/YAGEO/RC0805FR-7W10KL?qs=tggtontpCXMsb%2F0we6O%252BLw%3D%3D
R2 R4 R5 R6: library part ERJ-H3EF62R0V, "Resistor, ERJ-H3EF62R0V, 62ohms", Manufacturer_Name=Panasonic, Datasheet Link=http://industrial.panasonic.com/cdbs/www-data/pdf/RDQ0000/ast-ind-151033.pdf, Manufacturer_Part_Number=ERJ-H3EF62R0V
R9 R10 R12 R13 R15 R16 R17 R20: "Resistor", LatestRevisionDate=29-May-2009, LatestRevisionNote="IPC-7351 Footprint Added.", PackageDescription="Chip Resistor", PackageReference=J1-0603, Published=8-Jun-2000, Publisher="Altium Limited"
R11: library part CR0603-FX-1500ELF, "Resistor, CR0603-FX-1500ELF", Manufacturer_Name=Bourns, Mouser Part Number=652-CR0603FX-1500ELF, Arrow Part Number=CR0603-FX-1500ELF, Arrow Price/Stock=https://www.arrow.com/en/products/cr0603-fx-1500elf/bourns?region=nac, Datasheet Link=https://www.bourns.com/pdfs/chpreztr.pdf, Height=0.55mm, Manufacturer_Part_Number=CR0603-FX-1500ELF, Mouser Price/Stock=https://www.mouser.co.uk/ProductDetail/Bourns/CR0603-FX-1500ELF?qs=e7cxVwPieupBDLrUX3Cc4g%3D%3D
R18: library part ERJ-U06F5603V, "Resistor, ERJ-U06F5603V, 560k", Manufacturer_Name=Panasonic, Mouser Part Number=667-ERJ-U06F5603V, Datasheet Link=https://industrial.panasonic.com/cdbs/www-data/pdf/RDP0000/AOA0000C334.pdf, Height=0.7mm, Manufacturer_Part_Number=ERJ-U06F5603V, Mouser Price/Stock=http://www.mouser.com/Search/ProductDetail.aspx?qs=Yyy8avaXlIvDfDSBlVZXaA%3d%3d
R19: library part CRT1206-FZ-1001ELF, "Resistor, CRT1206-FZ-1001ELF", Manufacturer_Name=Bourns, Mouser Part Number=652-CRT1206FZ1001ELF, Arrow Part Number=CRT1206-FZ-1001ELF, Arrow Price/Stock=https://www.arrow.com/en/products/crt1206-fz-1001elf/bourns?region=nac, Datasheet Link=http://www.bourns.com/docs/Product-Datasheets/crt-as.pdf, Height=0.65mm, Manufacturer_Part_Number=CRT1206-FZ-1001ELF, Mouser Price/Stock=https://www.mouser.co.uk/ProductDetail/Bourns/CRT1206-FZ-1001ELF?qs=Zq5ylnUbLm4KSc2M9tALXQ%3D%3D
S1: "Switch", Manufacturer_Name=Panasonic, Mouser Part Number=667-EVP-BV4C1L000, Datasheet Link=https://www.mouser.de/datasheet/2/315/Panasonic_Switch__EVP_BV_Series__030122-2933967.pdf, Height=3.7mm, Manufacturer_Part_Number=EVP-BV4C1L000, Mouser Price/Stock=https://www.mouser.co.uk/ProductDetail/Panasonic/EVP-BV4C1L000?qs=MyNHzdoqoQKwTvV8HYjCOw%3D%3D
S2: "Switch", Manufacturer_Name="C & K COMPONENTS", Mouser Part Number=611-JS202011SCQN, Arrow Part Number=JS202011SCQN, Arrow Price/Stock=https://www.arrow.com/en/products/js202011scqn/ck?region=nac, Datasheet Link=http://www.ckswitches.com/media/1422/js.pdf, Height=5.5mm, Manufacturer_Part_Number=JS202011SCQN, Mouser Price/Stock=https://www.mouser.co.uk/ProductDetail/CK/JS202011SCQN?qs=LgMIjt8LuD95JYWxZ7NvZA%3D%3D
U1: "ARMÂ® CortexÂ®-M4 STM32F4 Microcontroller IC 32-Bit 84MHz 128KB _128K x 8_ FLASH 64-LQFP _10x10_", Package="LQFP-64 STMicroelectronics", Availability=Unavailable, MF=STMicroelectronics, MP=STM32F401RBT6, Price=None, SnapEDA_Link=https://www.snapeda.com/parts/STM32F401RBT6/STMicroelectronics/view-part/49021/?ref=snap
U2: "Integrated Circuit", Manufacturer_Name="Maxim Integrated", Mouser Part Number=700-MAX1555EZK+T, Arrow Part Number=MAX1555EZK+T, Arrow Price/Stock=https://www.arrow.com/en/products/max1555ezkt/maxim-integrated?region=nac, Datasheet Link=http://datasheets.maximintegrated.com/en/ds/MAX1551-MAX1555.pdf, Height=1.1mm, Manufacturer_Part_Number=MAX1555EZK+T, Mouser Price/Stock=https://www.mouser.co.uk/ProductDetail/Maxim-Integrated/MAX1555EZK%2bT?qs=LHmEVA8xxfYLEoVKeceKJA%3D%3D
U3: "Integrated Circuit", Manufacturer_Name="Fortune Semiconductor Corporation", Datasheet Link=https://www.ic-fortune.com/upload/Download/FS312F-G-DS-12_EN.pdf, Height=1.45mm, Manufacturer_Part_Number=FS312F-G
U5: "Integrated Circuit", Manufacturer_Name="Texas Instruments", Mouser Part Number=595-TPS62204DBVT, Arrow Part Number=TPS62204DBVT, Arrow Price/Stock=https://www.arrow.com/en/products/tps62204dbvt/texas-instruments, Datasheet Link=http://www.ti.com/lit/gpn/tps62204, Height=1.45mm, Manufacturer_Part_Number=TPS62204DBVT, Mouser Price/Stock=https://www.mouser.com/Search/Refine.aspx?Keyword=595-TPS62204DBVT
"USB A": "Connector", Manufacturer_Name="On Shore Technology Inc.", Datasheet Link=http://www.on-shore.com/wp-content/uploads/2015/09/usb-a1hsxx.pdf, Height=7.1mm, Manufacturer_Part_Number=USB-A1HSB6
Y1: "Crystal or Oscillator", Manufacturer_Name=IQD, Mouser Part Number=449-LFXTAL050985BULK, Datasheet Link=https://componentsearchengine.com/Datasheets/1/LFXTAL050985Bulk.pdf, Height=4.3mm, Manufacturer_Part_Number=LFXTAL050985Bulk, Mouser Price/Stock=https://www.mouser.com/Search/Refine.aspx?Keyword=449-LFXTAL050985BULK
Z1: "Zener Diode", Manufacturer_Name="ROHM Semiconductor", Mouser Part Number=755-PTZTFTE253.3B, Datasheet Link=https://fscdn.rohm.com/en/products/databook/datasheet/discrete/diode/zener/ptztfte252.2b-e.pdf, Height=2.2mm, Manufacturer_Part_Number=PTZTFTE253.3B, Mouser Price/Stock=https://www.mouser.co.uk/ProductDetail/ROHM-Semiconductor/PTZTFTE253.3B?qs=4v%252BiZTmLVHEC5iicBmVMIQ%3D%3D
?: library part C0603C270J5GAC7411, "Capacitor, C0603C270J5GAC7411, 27pF", Manufacturer_Name=KEMET, Datasheet Link=https://content.kemet.com/datasheets/KEM_C1003_C0G_SMD.pdf, Height=0.87mm, Manufacturer_Part_Number=C0603C270J5GAC7411

## Via types
v1: diameter 19.68, hole 11.81, Top Layer to Bottom Layer, 88 vias
v2: diameter 23.62, hole 11.81, Top Layer to Bottom Layer, 43 vias
v3: diameter 31.5, hole 19.68, Top Layer to Bottom Layer, 6 vias
v4: diameter 236.22, hole 137.8, Top Layer to Bottom Layer, 4 vias
v5: diameter 39.37, hole 23.62, Top Layer to Bottom Layer, 2 vias

## Nets (pads, with @x,y where several pads share a name; then routed paths per layer and width w, separated by ;. In a path a pad name is that pad's centre, name@x,y a point inside that pad or via, vN(x,y) a via of type N, cw(c..) or ccw(c..) an arc to the next point about the centre after c; other vN are vias at no path point)
3v3: ?.1 Boot.2 C1.1 C2.2 C3.2 C4.2 C5.2 C6.2 C7.2 C14.2 C22.2 C23.2 C24.2 C25.1 C26.2 C28.2 C29.2 ESPIC.1 J3v3.1 JUSART.1 L1.2 MD.3 MIC1.1 MIC2.3 P.2 R1.1 R3.1 R18.2 SPI.6 SWD.1 U1.1 U1.19 U1.32 U1.48 U1.64 | length 8401.5
  Top Layer w10: v2(2030,2975) 2028.52,2973.52 1911.48,2973.52 C22.2 1905.87,2972.05 1865,3012.91 1865,3240.55 1823.5,3282.05 P.2 1823.5,3287.95 2045,3509.45 2045,3554.14 2085.86,3595 SPI.6 2359.57,3595 2425.24,3529.33 C6.2 ; C7.2 2325.67,3070 C5.2 ; v2(2375,3180) 2371.31,3180 2366.31,3175 C5.2 ; C3.2@2735,3430 2719.17,3445.83 2713.35,3445.83 2685,3474.17 C2.2 ; C3.2@2740,3400.24 2820,3320.24 2820,3155 2812.56,3147.56 C1.1 2755.47,3085.47 v2(2720,3050) 2655,2985 Boot.2 2705,2825 3220,2825 3235,2840 3235,2842.8 3269.14,2842.8 C29.2 ; v2(2740,3535) 2695,3535 C2.2 ; v3(3235,4495) 3262.02,4522.02 ESPIC.1 ; C29.2@3275,2845 3363.23,2845 3393.43,2814.8 MIC1.1 3405,2818.31 v2(3405,3010) ; SWD.1 3210,3590 2915,3590 JUSART.1 2720.83,3555.83 2701.06,3555.83 2685,3539.76 C2.2 ; C5.2 C4.2 2325.67,3304.76 2390.87,3369.96 2390.87,3442.57 2440,3491.7 C6.2 ; C6.2 2454.76,3529.33 2515.43,3590 2660,3590 2668.94,3581.06 2668.94,3541.06 C2.2
  Bottom Layer w10: MD.3 2013.72,2987.6 2026.31,2975 v2(2030,2975) ; L1.2 2143.53,4746.47 ?.1 R18.2 2396.5,4633.5 2396.5,4622.32 2405.87,4612.95 C23.2 2502.05,4612.95 C14.2 2630,4610 J3v3.1 2663.96,4576.04 2692.7,4576.04 R3.1@2861.14,4407.6 ; SPI.6 2152.55,3595 2288.94,3458.61 U1.32 ; U1.19 2315.43,3201.8 2353.2,3201.8 v2(2375,3180) ; U1.1 2682.64,3064.91 2683.54,3064.01 2702.31,3064.01 2716.31,3050 v2(2720,3050) 2720,3053.69 2728.98,3062.66 2728.98,3162.43 2729.88,3163.34 U1.64 ; U1.48 2682.64,3534.09 2683.54,3535 v2(2740,3535) ; JUSART.1 2750,3755 2750,4296.46 R3.1@2861.14,4407.6 ; R1.1@3242.4,4720 3242.4,4711.14 3263.54,4690 3265,4690 3265,4525 v3(3235,4495) 3232.95,4492.95 C25.1 3088.62,4492.95 C26.2 3076.85,4481.18 C24.2 2957.44,4458.62 2929.88,4458.62 2878.86,4407.6 R3.1 R3.1@2861.14,4407.6 ; v2(3405,3010) 3407.61,3007.39 3423.04,3007.39 3480.67,2949.76 C28.2 3480.67,2837.13 3464.8,2821.26 MIC2.3
BATT+: BatteryHold.1 C19.2 R12.1 S2.1 U2.5 Z1.1 | length 1669.1
  Top Layer w10: S2.1@1598.27,3491.57 1599.84,3490 1655,3490 1740,3575 1740,3862.14 ; v2(1740,3900) 1740,3862.14 ; BatteryHold.1 1740,3862.14
  Bottom Layer w10: C19.2 1598.43,4085.47 R12.1 1675,3988.74 Z1.1 1711.54,3965 1738.03,3938.5 1738.03,3901.97 v2(1740,3900) ; R12.1@1672.95,4085.47 1672.95,4088.43 R12.1@1675,4090.47
  Bottom Layer w15: Z1.1@1711.54,3965 1789.92,3965 1832.32,4007.4 U2.5 ; BatteryHold.1 BatteryHold.1@2222.28,4377.69
BattStat: C16.1 ESPIC.3 J4.1 S2.2 U5.1 U5.3 | length 2713.6
  Top Layer w10: S2.2@1598.27,3590 1644.14,3590 1695,3640.86 1695,4120 v2(1965,4390) ; v2(2220,4535) 2440,4755 J4.1 2665,4800 2685,4820 3100,4820 3131.19,4788.81 3131.19,4628.31 ESPIC.3
  Bottom Layer w10: v2(1965,4390) 1994.21,4419.21 U5.3 2107.45,4462.6 C16.1 C16.1@2109.85,4474.87 ; U5.1 2047.32,4537.4 C16.1@2109.85,4474.87 ; v2(2220,4535) 2179.85,4535 2140.41,4495.56 2130.53,4495.56 C16.1@2109.85,4474.87
BMS_InV: C20.2 R12.2 U3.5 | length 319.1
  Bottom Layer w10: C20.2 1675.33,4299 1675.33,4240.33 ; C20.2@1669.67,4305.33 C20.2@1690.34,4326.01 ; R12.2 R12.2@1675.33,4144.53 ; R12.2@1687.72,4153.31 1678.94,4144.53 R12.2@1675.33,4144.53 ; U3.5 1675.67,4240 1675.33,4240.33 ; R12.2@1675.33,4144.53 1675.33,4240.33
Boot0: Boot.1 R19.1 U1.60 | length 493.6
  Top Layer w10: Boot.1 2762.21,2882.21 2762.21,2913.67 2857.18,3008.63 R19.1 2875,3011.69 v2(2875,3070)
  Bottom Layer w10: U1.60 2756.38,3241.17 2788.24,3241.17 2875,3154.41 v2(2875,3070)
D1/D2: U4.2 U4.5 | length 98.4
  Bottom Layer w10: U4.5 U4.2
Data: ESPIC.15 JUSART.2 U1.43 | length 689.9
  Top Layer w10: JUSART.2 2856.3,3791.3 2961.35,3791.3 3084.85,3914.8 ESPIC.15
  Bottom Layer w10: U1.43 2585.12,3532.35 2585.12,3564.21 2634.19,3613.28 2678.28,3613.28 JUSART.2
EN_PD: C27.2 ESPIC.2 J1.2 R1.2 | length 1010.1
  Top Layer w10: J1.2 2635,4035.82 3202.96,4603.78 ESPIC.2 3202.96,4627.4 3171.85,4658.51 3171.85,4678.15 v1(3170,4680)
  Bottom Layer w10: C27.2@3167.05,4795 3167.05,4720.55 3170,4717.6 v1(3170,4680)
G1: U3.1 U4.6 | length 138.7
  Bottom Layer w10: U3.1@1886.17,4275 U4.6@2024.88,4275
G2: U3.3 U4.4 | length 143.1
  Bottom Layer w10: U3.3@1883.45,4200 2017.05,4200 U4.4@2023.79,4193.26
GND: Boot.3 C1.2 C2.1 C3.1 C4.1 C5.1 C6.1 C7.1 C8.2 C9.1 C10.1 C11.1 C12.1 C13.2 C14.1 C16.2 C17.1 C21.1 C22.1 C23.1 C24.1 C25.2 C26.1 C27.1 C28.1 C29.1 ESPIC.9 ESPIC.19 ESPIC.20 ESPIC.21 ESPIC.22 ESPIC.23 ESPIC.24 ESPIC.25 ESPIC.26 ESPIC.27 GPIO.5 J1.1 J3v3.2 J5.1 JUSART.6 MD.2 MIC1.4 MIC1.5 MIC1.6 MIC2.1 MIC2.2 MIC2.4 Mot.2 R2.2 R4.2 R5.2 R6.2 R13.2 R16.1 R17.2 R19.2 R20.1 S1.A1 S1.A2 SPI.1 SWD.3 U1.12 U1.18 U1.31 U1.47 U1.63 U4.1 U5.2 | length 25.4
  Bottom Layer w10: R17.2@1735.47,4496.06 R17.2 R17.2@1736.26,4500.79 ; C13.2@1736.26,4559.21 C13.2 ; R13.2 R13.2@2089.53,4358.28 ; U4.1@2116.65,4284.21 2117.44,4283.41 U4.1@2131.59,4283.41
  other v1: 3460,2690 2995,2740 3195,2745 2280,2780 1965,2785 2510,2785 3445,2870 1920,2900 1685,2925 2260,2960 2395,2960 2115,2975 3190,2975 2470,2980 2780,2990 1675,3070 3200,3080 2185,3130 1725,3245 3200,3265 3380,3275 2580,3285 2660,3335 1505,3355 2425,3365 3200,3410 2575,3455 1755,3480 2185,3485 1490,3520 3195,3555 2240,3560 2405,3590 3215,3625 2215,3645 2930,3660 1940,3670 1490,3700 3350,3720 2810,3780 2235,3790 2900,3830 2675,3835 1495,3855 2455,3900 1345,3945 2255,3975 2850,3995 1640,4045 2805,4050 1760,4105 2250,4105 2430,4110 2820,4110 1600,4150 1955,4165 1340,4190 1725,4200 2935,4210 3100,4210 2430,4235 2890,4235 2255,4240 3100,4255 2935,4260 3170,4295 3020,4310 1730,4345 2370,4365 2050,4405 2695,4420 1765,4430 1345,4480 2795,4545 3030,4550 3210,4550 2330,4570 1390,4645 3210,4680 2695,4685 2065,4690 2215,4695 1780,4720 1625,4800 3270,4810 2070,4815 2590,4840
  other v4: 1135,2465 3720,2465 1135,4750 3720,4750
GNDBatt: "USB A.4" BatteryHold.2 C18.1 C19.1 C20.1 R11.2 U2.2 U2.4 U3.6 U4.3 Z1.2 | length 3268.6
  Top Layer w10: 1530,2826.57 1605,2901.57 1605,3215 1785,3395 v3(1785,3815) 2025,4055 v3(2120,4055)
  Bottom Layer w10: BatteryHold.2 1446.8,4331.72 1478.28,4331.72 1480,4330 1544.61,4330 C20.1@1560.67,4313.94 ; v2(1785,3555) 1787.61,3552.39 1787.61,3546.88 1833.5,3500.98 R11.2 ; U3.6 U3.6@1775,4277.4 ; C18.1@2011.38,3960 2005.98,3965.4 1945.19,3965.4 U2.2 1889.41,3970 1852.01,3932.6 U2.4 1842.17,3872.17 v3(1785,3815) 1704.06,3815 1554.06,3965 Z1.2 1542.05,3965.79 C19.1 1542.05,4271.61 1560.67,4290.24 C20.1 C20.1@1560.67,4313.94 ; U4.3 2122.21,4199.6 2122.21,4057.21 v3(2120,4055) ; C20.1@1560.67,4313.94 1560.67,4374.81 1566.53,4380.67 1754.33,4380.67 1775,4360 U3.6@1775,4277.4 ; U3.6@1775,4277.4 1775,4276.38 1773.98,4277.4 U3.6@1775,4277.4
GPIO0: GPIO.1 U1.14 | length 216.9
  Bottom Layer w10: U1.14 2426.73,3064.91 2430.23,3061.42 GPIO.1
GPIO1: GPIO.2 U1.15 | length 247.3
  Bottom Layer w10: GPIO.2 2330.23,2939.38 2407.05,3016.2 U1.15
GPIO2: GPIO.3 U1.16 | length 280.6
  Bottom Layer w10: GPIO.3 2387.36,3032.14 U1.16
GPIO3: GPIO.4 U1.17 | length 366.7
  Bottom Layer w10: GPIO.4 2305.23,3050 2308.67,3050 2314.53,3055.86 U1.17
GPIO5: ESPIC.4 J4.5 | length 147.8
  Top Layer w10: J4.5 3065,4675 3085,4655 3085,4615.74 ESPIC.4
GPIO6: ESPIC.5 J4.4 | length 181.4
  Top Layer w10: J4.4@2980.67,4755 J4.4 2965,4740 3025.8,4679.2 ESPIC.5 ESPIC.5@3025,4616.39
GPIO7: ESPIC.6 J4.3 | length 182.9
  Top Layer w10: J4.3 2964.44,4655.56 2966.74,4655.56 ESPIC.6
GPIO8: ESPIC.7 J4.2 R3.2 | length 542
  Top Layer w10: J4.2@2780.67,4755 J4.2 2765,4750 2815,4700 2835.09,4700 2907.69,4627.4 ESPIC.7
  Bottom Layer w10: J4.2 2870,4650 R3.2
GPIO9: ESPIC.8 J5.5 | length 1303.4
  Top Layer w10: v2(2845,4180) 2921.2,4103.8 3191.2,4103.8 v2(3265,4030) ; v2(2845,4325) 2845,4611.96 ESPIC.8
  Bottom Layer w10: v2(2845,4180) v2(2845,4325) ; v2(3265,4030) 3265,3880.86 3270.86,3875 3335,3875 J5.5
GPIO10: ESPIC.10 J5.4 | length 910.5
  Top Layer w10: ESPIC.10 2790,3927.04 v2(2790,3980) ; v2(2900,3760) 3000,3660 J5.4
  Bottom Layer w10: v2(2790,3980) 2790,3870 v2(2900,3760)
GPIO18: ESPIC.13 J5.3 | length 811
  Top Layer w10: ESPIC.13 2966.74,3938.43 3003.32,3975 v2(3230,3975) ; v2(3360,3625) 3361.81,3623.19 3386.81,3623.19 J5.3
  Bottom Layer w10: v2(3230,3975) 3230,3815 3305,3740 3305,3680 v2(3360,3625)
GPIO19: ESPIC.14 J5.2 | length 699.3
  Top Layer w10: v2(3000,3870) 3000,3873.69 3013.08,3886.77 3013.08,3913.9 ESPIC.14
  Bottom Layer w10: v2(3000,3870) 3002.61,3867.39 3002.61,3846.55 3190.34,3658.81 3251.19,3658.81 J5.2
High_Bat: ESPIC.16 H.2 | length 162.5
  Top Layer w10: H.2 3072.95,3796.5 3143.91,3867.45 ESPIC.16
I2S2_CK: JMic.2 MIC1.2 MIC2.6 U1.34 U1.51 | length 3665.7
  Top Layer w10: v2(2535,3300) 2535,3067.93 2510,3042.93 2510,2825.86 2515.86,2820 2560,2820 JMic.2 2690,2780 MIC1.2 ; v2(2940,3300) v2(3015,3225)
  Bottom Layer w10: U1.34 2407.05,3427.95 v2(2535,3300) ; JMic.2@2654.81,2709.51 2654.81,2725.19 JMic.2 2645,2670 2660,2655 3369.77,2655 3431.5,2716.72 3431.5,2721.02 3439.21,2728.74 MIC2.6 3439.21,2736.61 3431.5,2744.33 3431.5,2748.63 3425.64,2754.49 3421.42,2754.49 3234.25,2941.65 3234.25,3005.75 v2(3015,3225) ; U1.51 2756.38,3418.34 2800.55,3418.34 2838.14,3380.75 2870.36,3380.75 2937.39,3313.72 2937.39,3302.61 v2(2940,3300)
I2S2_SD: JMic.1 MIC1.3 MIC2.7 R20.2 U1.36 U1.53 | length 3357.7
  Top Layer w10: v2(2565,3360) 2670,3255 2670,3080 2605,3015 2605,2830 v2(2630,2805) ; JMic.1 2785,2695 3343.23,2695 3393.43,2745.2 MIC1.3 ; v2(2819.02,3369.02) 2820.65,3367.39 2833.45,3367.39 2950.43,3250.42 2950.43,3244.57 v2(2970,3225)
  Bottom Layer w10: U1.36 2446.42,3478.58 v2(2565,3360) ; v2(2630,2805) 2675,2805 JMic.1 2785,2695 3340,2695 3377.68,2732.68 ; U1.53 2806.44,3379.87 2817.29,3369.02 v2(2819.02,3369.02) ; v2(2970,3225) 3060.76,3134.24 3078.51,3134.24 3219.25,2993.5 3219.25,2875.75 3362.32,2732.68 3377.68,2732.68 ; MIC2.7 3377.68,2732.68
I2S3_WS: MIC2.5 U1.50 | length 1455.3
  Top Layer w10: v2(2880,3510) v2(3185,3510)
  Bottom Layer w10: U1.50 2843.93,3438.93 2880,3475 v2(2880,3510) ; v2(3185,3510) 3235,3460 3334.14,3460 3340,3454.14 3340,2857.12 3406.43,2790.68 3448.26,2790.68 3464.8,2774.14 MIC2.5
Low_Bat: ESPIC.18 L.2 | length 133
  Top Layer w10: L.2 3262.02,3803.51 ESPIC.18
M+: C21.2 MD.4 Mot.1 R15.2 | length 480.3
  Top Layer w10: Mot.1 1777.05,2802.05 C21.2
  Bottom Layer w10: R15.2@1725,2990.47 1726.44,2989.04 1776.27,2989.04 1787.63,2989.04 MD.4 1776.27,2987.6 1765,2976.33 Mot.1
MControl: MD.1 U1.27 | length 653.9
  Top Layer w10: v2(2015,3340) 2215,3340 v2(2245,3370)
  Bottom Layer w10: MD.1 1900.29,3062.4 1907.1,3069.21 1907.1,3117.1 2015,3225 v2(2015,3340) ; v2(2245,3370) 2248.69,3370 2258.5,3360.19 U1.27
Mid_Bat: ESPIC.17 LED3.2 | length 147.6
  Top Layer w10: LED3.2 3167.95,3796.5 3202.96,3831.51 ESPIC.17
"Net        _2": ?.2 C13.1 R17.1 R18.1 U5.4 | length 905.6
  Top Layer w10: v3(1790,4625) 1795.82,4625 1795.82,4620.89 1816.71,4600 v3(2210,4600)
  Bottom Layer w10: v3(1790,4625) 1791.48,4623.52 1791.48,4561.48 1793.74,4559.21 1793.74,4500.79 R17.1 1794.53,4496.06 1827.99,4462.6 U5.4 ; ?.2 2150.98,4677.01 2205.89,4622.11 2205.89,4604.11 v3(2210,4600) 2242.52,4600 R18.1 R18.1@2272.48,4665
NetC17_2: C17.2 R9.1 Y1.2 | length 358.9
  Bottom Layer w10: R9.1 3020.46,3404.53 3032.05,3392.94 C17.2
NetCH_1: Ch.1 R11.1 | length 112
  Top Layer w10: Ch.1 v2(1955,3500)
  Bottom Layer w10: R11.1 v2@1950,3500
NetCH_2: Ch.2 R10.1 U2.3 | length 519
  Top Layer w10: Ch.2@1828.5,3500 1828.5,3773.5 v2(1900,3845)
  Bottom Layer w10: v2(1900,3845) 1903.69,3845 1908.69,3850 R10.1 1951.85,3926.77 1946.02,3932.6 U2.3
NetH_1: H.1 R6.1 | length 419.8
  Top Layer w10: v2(3005,3730) 3066.5,3730 H.1
  Bottom Layer w10: R6.1 2940,3795 v2(3005,3730)
NetL1_1: L1.1 U5.5 | length 144.7
  Bottom Layer w10: U5.5 1908.58,4537.4 1915.39,4544.21 1915.39,4580.42 1940,4605.02 L1.1
NetL_1: L.1 R4.1 | length 455.2
  Top Layer w10: L.1 3265,3723.5 v2(3265,3685)
  Bottom Layer w10: R4.1 3190,3760 v2(3265,3685)
NetLED3_1: LED3.1 R5.1 | length 487.2
  Top Layer w10: LED3.1 3167.95,3733.5 3192.39,3709.06 3192.39,3687.61 v2(3195,3685)
  Bottom Layer w10: R5.1@3066.88,4056.46 3066.88,3813.12 v2(3195,3685)
NetMD_5: MD.5 R15.1 R16.2 | length 170.1
  Top Layer w10: v2(1725,3090) 1727.61,3087.39 1748.08,3087.39 1757.76,3077.72 1761.69,3077.72 1770.47,3068.94 R16.2
  Bottom Layer w10: R15.1 1725,3054.53 v2(1725,3090) ; R15.1@1725,3049.53 1763.4,3049.53 1776.27,3062.4 MD.5
NetP_1: P.1 R2.1 | length 130
  Top Layer w10: P.1 v2(1950,3285)
  Bottom Layer w10: R2.1 v2(1950,3285)
NetR13_1: R13.1 U3.2 | length 239.6
  Top Layer w10: v5@1958,4315 1959,4314 1959,4241 v5(1960,4240)
  Bottom Layer w10: U3.2@1882.93,4240 U3.2 v5(1960,4240) ; v5(1958,4320) 1958.54,4320 1992.88,4354.34 R13.1
NRST: C11.2 S1.B1 S1.B2 SWD.5 U1.7 | length 1432.6
  Top Layer w10: S1.B1 2926.26,3348.74 3047.71,3227.29 ; v2(2950,2940) 2952.61,2942.61 2952.61,2962.17 2980.67,2990.24 C11.2 2980.67,3019.76 2926.26,3074.17 S1.B2 2977.66,3156.81 3036.81,3215.97 3036.81,3216.38 3047.71,3227.29 ; SWD.5 3172.71,3227.29 3047.71,3227.29
  Bottom Layer w10: U1.7 2564.53,2945.86 2570.39,2940 v2(2950,2940)
OSC_IN: C12.2 U1.5 Y1.1 | length 678.2
  Bottom Layer w10: U1.5 2604.8,3089.6 2604.8,3057.74 2646.57,3015.97 Y1.1 3029.03,3010 3007.05,2988.02 C12.2
OSC_OUT: R9.2 U1.6 | length 654.6
  Top Layer w10: v2(2735,2980) 2735,3005 2860,3130 v2(2860,3300)
  Bottom Layer w10: U1.6 2584.61,3090.11 2584.61,3020.39 2625,2980 v2(2735,2980) ; v2(2860,3300) R9.2
RXD0: ESPIC.11 JUSART.5 U1.37 | length 678.3
  Top Layer w10: JUSART.5 2556.3,3791.3 2725.13,3791.3 2848.63,3914.8 ESPIC.11
  Bottom Layer w10: JUSART.5 2435,3621.63 2466.1,3590.53 U1.37
Shield: "USB A.MH1" "USB A.MH2" | length 517.3
  Top Layer w10: 1423.31,2705.71 1423.31,3223.03
SPI_MISO: SPI.4 U1.22 | length 269.7
  Bottom Layer w10: SPI.4 2110.52,3384.48 2145.8,3384.48 2268.03,3262.25 2314.04,3262.25 U1.22
SPI_MOSI: SPI.5 U1.23 | length 321.1
  Bottom Layer w10: SPI.5 2194.7,3400.3 2194.7,3369.41 2281.76,3282.35 2313.62,3282.35 U1.23
SPI_NSS: SPI.2 U1.20 | length 225.9
  Bottom Layer w10: SPI.2 2188.21,3195 2215.6,3222.39 U1.20
SPI_SCK: SPI.3 U1.21 | length 236.4
  Bottom Layer w10: SPI.3 2175.44,3295 2228.37,3242.08 U1.21
SWCLK: SWD.2 U1.49 | length 560
  Top Layer w10: v2(2820,3465) 3235,3465 SWD.2
  Bottom Layer w10: U1.49 2809.93,3458.61 2816.31,3465 v2(2820,3465)
SWDIO: SWD.4 U1.46 | length 1010.8
  Bottom Layer w10: U1.46 2644.17,3532.35 2644.17,3564.21 2674.96,3595 2970,3595 2990,3615 3129.14,3615 3155,3589.14 3155,3375 3281.63,3248.37 3281.63,3218.37 SWD.4
SWO: SWD.6 U1.55 | length 694.4
  Bottom Layer w10: U1.55 2798.64,3340.5 2804.5,3334.64 2804.5,3315.5 2873.19,3246.81 3073.19,3246.81 3279.48,3040.52 3279.48,3020.52 SWD.6
TXD0: ESPIC.12 JUSART.4 U1.38 | length 644.8
  Top Layer w10: JUSART.4 2620,3755 2747.88,3755 2907.69,3914.8 ESPIC.12
  Bottom Layer w10: U1.38 2485.79,3581.48 2526.83,3622.52 2526.83,3661.83 JUSART.4
USART_CK: JUSART.3 U1.39 | length 205.6
  Bottom Layer w10: U1.39 2506.38,3532.35 2506.38,3564.21 2555.45,3613.28 2578.28,3613.28 JUSART.3
VCAP: C8.1 U1.30 | length 176.8
  Top Layer w10: v2(2235,3420) 2325.3,3420 C8.1
  Bottom Layer w10: v2(2235,3420) 2235.38,3419.62 2314.15,3419.62 U1.30
VREF+: C9.2 C10.2 U1.13 | length 302.8
  Top Layer w10: v2(2495,3165) 2495,3211.87 C9.2 ; C10.2 v2(2595,3165)
  Bottom Layer w10: U1.13 2447.32,3091.41 2447.32,3123.27 2486.45,3162.39 2492.39,3162.39 v2(2495,3165) v2(2595,3165)
Vusb_5V: "USB A.1" C18.2 R10.2 U2.1 | length 1314
  Top Layer w10: 1530,3102.17 1530,3225 v3(1720,3415)
  Bottom Layer w10: v3(1720,3415) 1720,3600 1905,3785 1985,3785 2010.91,3810.91 R10.2 2010.91,3904.42 C18.2 2055.52,3904.89 2061.38,3910.75 2061.38,3999.14 2053.12,4007.4 U2.1
pads on no net: "USB A.2" "USB A.3" S2.3 S2.4 S2.5 S2.6 U1.2 U1.3 U1.4 U1.8 U1.9 U1.10 U1.11 U1.24 U1.25 U1.26 U1.28 U1.29 U1.33 U1.35 U1.40 U1.41 U1.42 U1.44 U1.45 U1.52 U1.54 U1.56 U1.57 U1.58 U1.59 U1.61 U1.62 U3.4

## Polygon pours and split planes (outlines as drawn)
no net on Bottom Layer "NONET_L02_P001" (solid, pour order 1): 3690,4490 3770,4410 3770,4375
GND on Bottom Layer "GND_L02_P000" (solid, pour order 0): 995,4885 995,2330 1000,2325 3860,2325 3860,4885
GND on Top Layer "GND_L01_P002" (solid, pour order 2): 1000,4895 1000,2325 3860,2325 3860,4885

## Silkscreen, mask and mechanical layers (free items; w line width, h text height)
Top Overlay:
  text "By KS and RD" at 1195.01,3435 h60 r90
  text "ELEC3117 V1 Mic Board" at 1094.98,3430 h60 r90
Mechanical 1:
  the board outline again, w10